# Altium PCB Passenger.PcbDoc
Units mm, origin at the board's own origin, x right, y up, seen from the top; angles counter-clockwise.
Board outline 68 x 57.1 mm, 2 copper layers (Top Layer, Bottom Layer); 49 components, 72 nets, 205 pads, 71 vias.
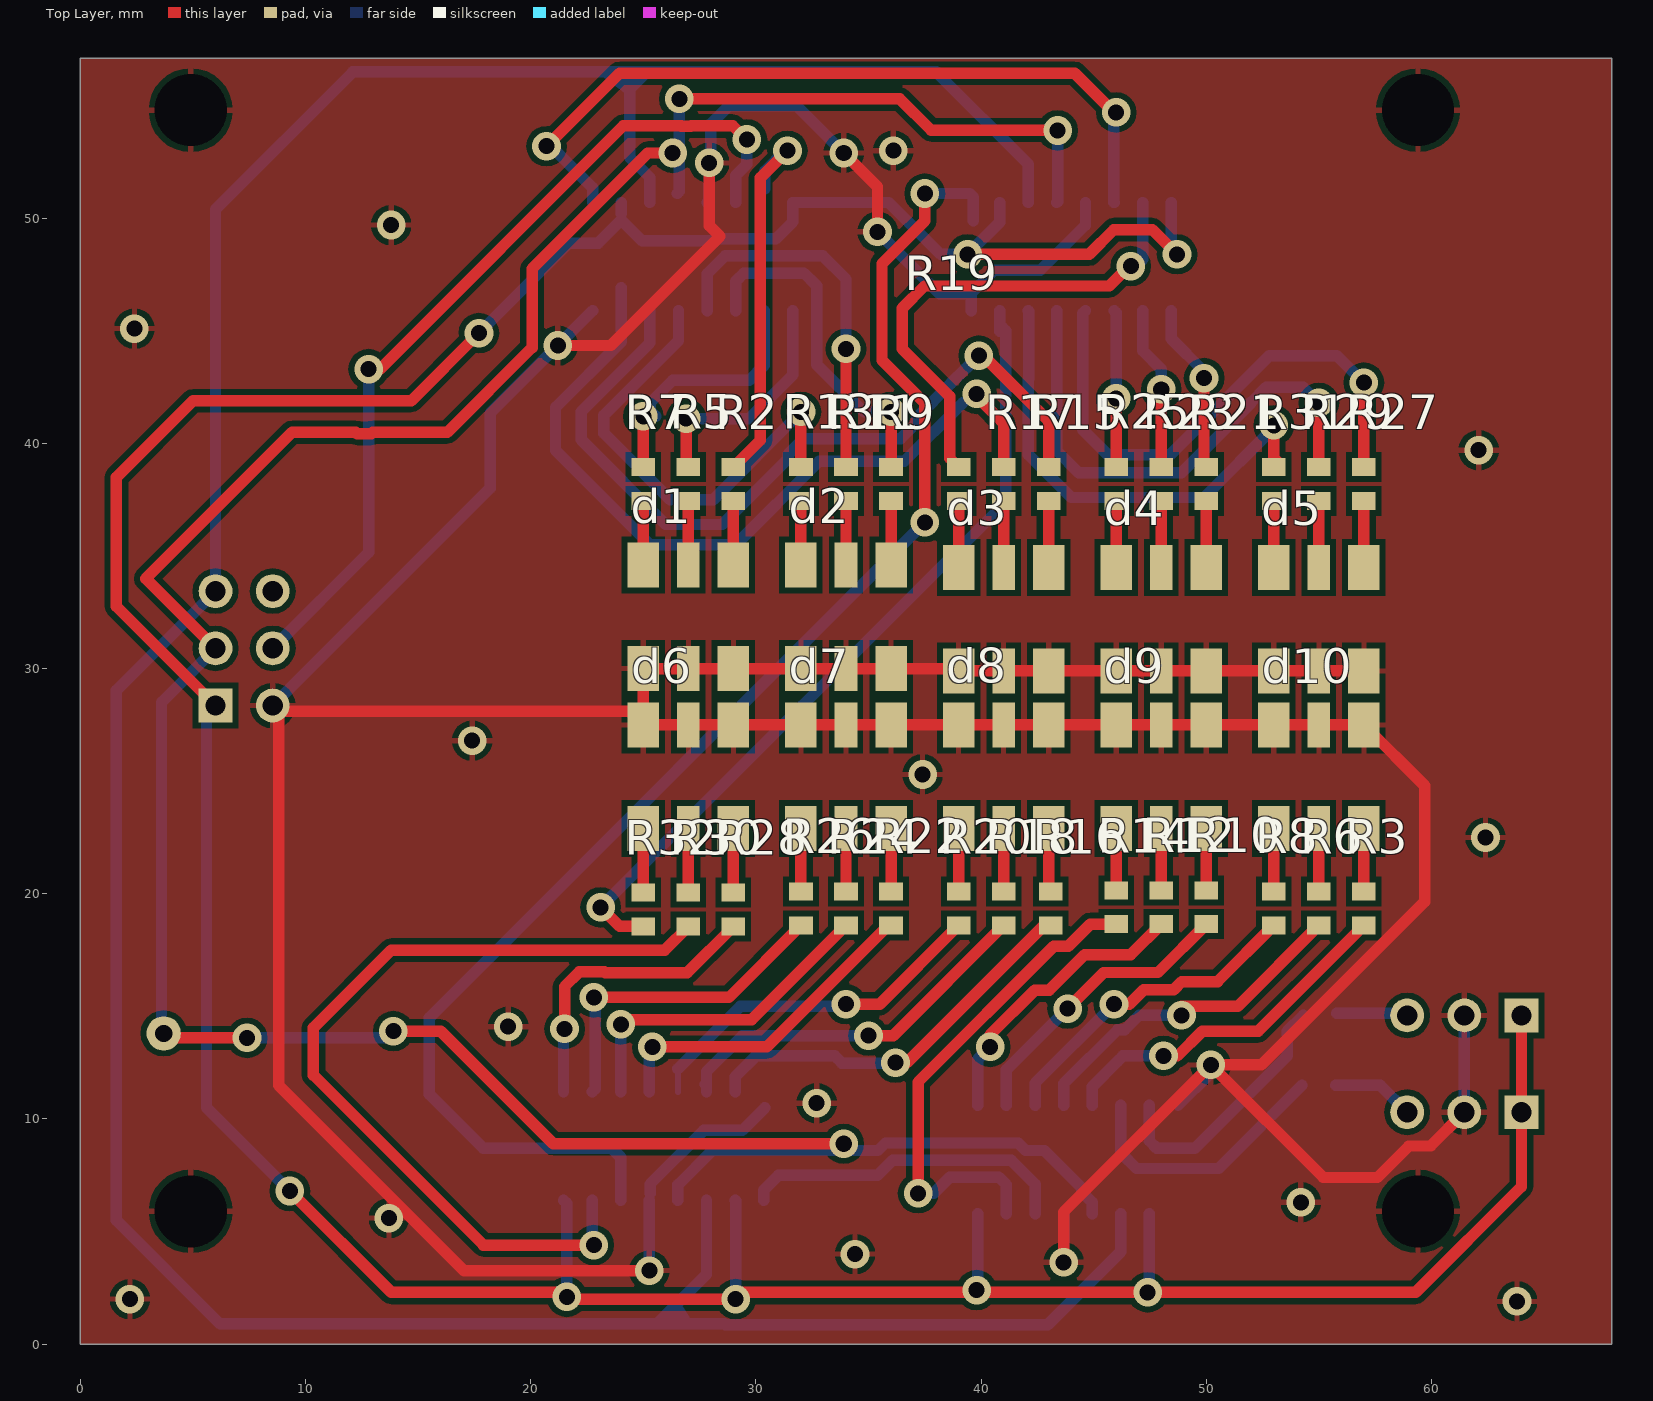
[diagram p0: Top Layer view]
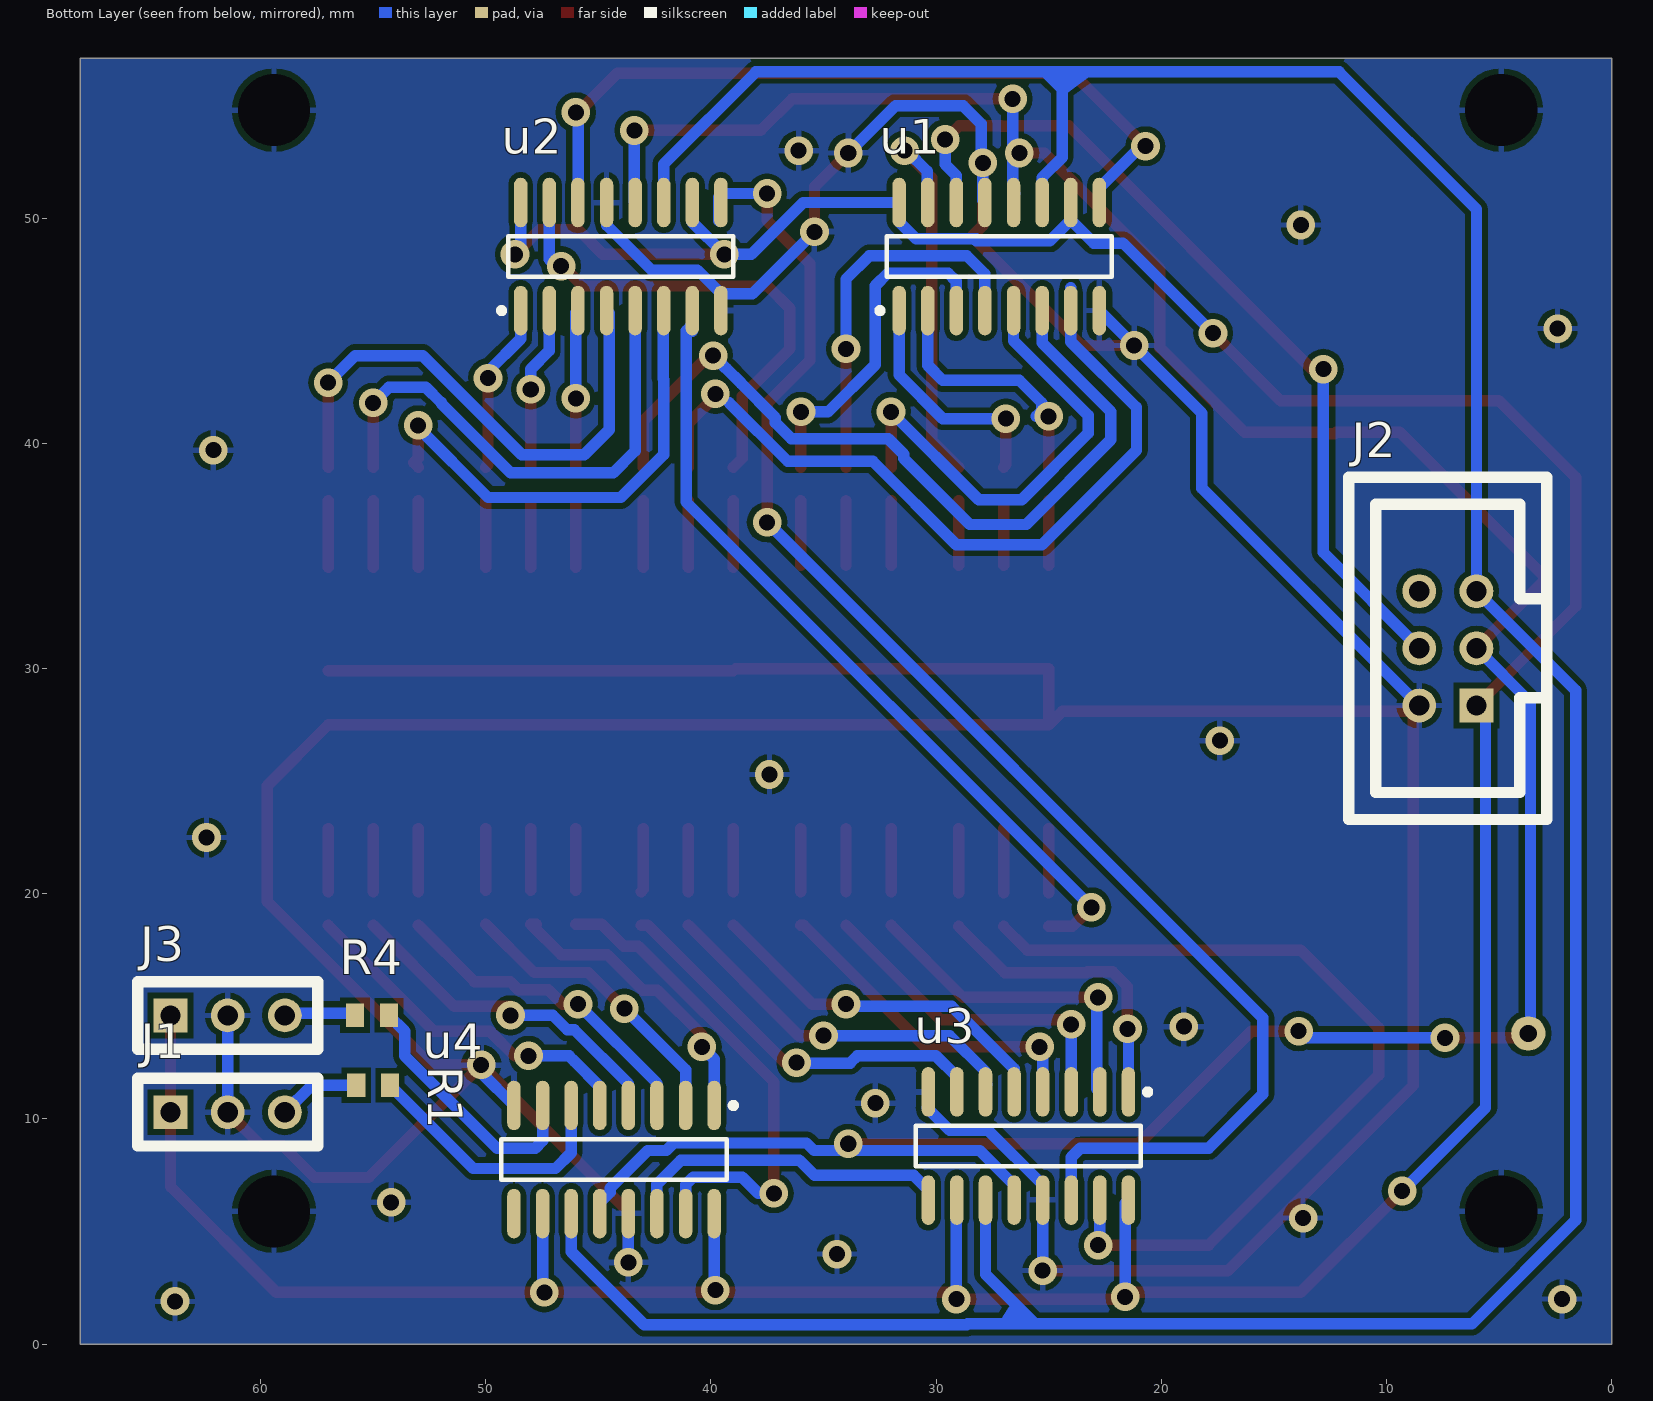
[diagram p1: Bottom Layer view, seen from below]

## Layer stack, top to bottom
Top Solder: solder mask 0.0102, Solder Resist, Dk 3.5
Top Layer: signal copper 0.0356
Dielectric1: dielectric 0.32, FR-4, Dk 4.8
Bottom Layer: signal copper 0.0356
Bottom Solder: solder mask 0.0102, Solder Resist, Dk 3.5

## Board outline
0,57.1 68,57.1 68,0 0,0

## Design rules (kind name [scope] priority, off if disabled: settings)
Clearance [All] p1: gap=0.254
FabricationTestPointUsage TestPointUsage [All] p1: valid=0 allowmultiple=FALSE
FabricationTestpoint Testpoint [All] p1: side=3 testpointundercomponent=TRUE minsize=1.016 maxsize=2.54 preferedsize=1.524 minholesize=0 maxholesize=1.016 preferedholesize=0.813 testpointgrid=0.025 allowsidetop=TRUE allowsidebottom=TRUE usegrid=TRUE gridtolerance=0
HoleSize [All] p1: absolutevalues=TRUE maxlimit=5 minlimit=0.025 maxpercent=80.000 minpercent=20.000
PolygonConnect [All] p1: connectstyle=Relief reliefconductorwidth=0.254 reliefentries=4 polygonreliefangle="90 Angle" airgapwidth=0.254
RoutingVias [All] p1: holewidth=0.711 width=1.27 viastyle="Through Hole" minholewidth=0.711 minwidth=1.27 maxholewidth=0.711 maxwidth=1.27
SilkToSolderMaskClearance SilkscreenOverComponentPads [IsPad] p1: minsilkscreentomaskgap=0.254 clearancetoexposedcopper=TRUE
SolderMaskExpansion [All] p1: expansion=0.102
Width [All] p1: maxlimit=0.6 minlimit=0.254 preferedwidth=0.254 minimp=50.000000 maximp=50.000000 favimp=50.000000
26 further rules are at their usual default settings.

## Components (designator, comment, footprint, x,y, rotation, side; value= is the part's Value field where it differs from the comment)
d1 "plcc6" plcc6 29.3,31.5 r270 top
d2 "plcc6" plcc6 36.3,31.5 r270 top
d3 "plcc6" plcc6 43.3,31.4 r270 top
d4 "plcc6" plcc6 50.3,31.4 r270 top
d5 "plcc6" plcc6 57.3,31.4 r270 top
d6 "plcc6" plcc6 24.7,26 r90 top
d7 "plcc6" plcc6 31.7,26 r90 top
d8 "plcc6" plcc6 38.7,26 r90 top
d9 "plcc6" plcc6 45.7,26 r90 top
d10 "plcc6" plcc6 52.7,26 r90 top
J1 "CNCTR" CNCTR_1X3 61.46,10.3 r90 bottom
J2 "IDC6" IDC6 7.27,30.9 r0 bottom
J3 "CNCTR" CNCTR_1X3 61.46,14.6 r90 bottom
R1 "RES" RESC1608X06M 55,11.5 r0 bottom
R2 "RES" RESC1608X06M 29,38.2 r270 top
R3 "RES" RESC1608X06M 57,19.35 r270 top
R4 "RES" RESC1608X06M 55.05,14.6 r0 bottom
R5 "RES" RESC1608X06M 27,38.2 r270 top
R6 "RES" RESC1608X06M 55,19.35 r270 top
R7 "RES" RESC1608X06M 25,38.2 r270 top
R8 "RES" RESC1608X06M 53,19.35 r270 top
R9 "RES" RESC1608X06M 36,38.2 r270 top
R10 "RES" RESC1608X06M 50,19.4 r270 top
R11 "RES" RESC1608X06M 34,38.2 r270 top
R12 "RES" RESC1608X06M 48,19.4 r270 top
R13 "RES" RESC1608X06M 32,38.2 r270 top
R14 "RES" RESC1608X06M 46,19.4 r270 top
R15 "RES" RESC1608X06M 43,38.2 r270 top
R16 "RES" RESC1608X06M 43.1,19.35 r270 top
R17 "RES" RESC1608X06M 41,38.2 r270 top
R18 "RES" RESC1608X06M 41,19.35 r270 top
R19 "RES" RESC1608X06M 39,38.2 r270 top
R20 "RES" RESC1608X06M 39,19.35 r270 top
R21 "RES" RESC1608X06M 50,38.2 r270 top
R22 "RES" RESC1608X06M 36,19.35 r270 top
R23 "RES" RESC1608X06M 48,38.2 r270 top
R24 "RES" RESC1608X06M 34,19.35 r270 top
R25 "RES" RESC1608X06M 46,38.2 r270 top
R26 "RES" RESC1608X06M 32,19.35 r270 top
R27 "RES" RESC1608X06M 57,38.2 r270 top
R28 "RES" RESC1608X06M 29,19.3 r270 top
R29 "RES" RESC1608X06M 55,38.2 r270 top
R30 "RES" RESC1608X06M 27,19.3 r270 top
R31 "RES" RESC1608X06M 53,38.2 r270 top
R32 "RES" RESC1608X06M 25,19.3 r270 top
u1 "SN74HC595D" D016_N 27.195,48.3 r90 bottom
u2 "SN74HC595D" D016_N 44,48.3 r90 bottom
u3 "SN74HC595D" D016_N 25.9,8.8 r270 bottom
u4 "SN74HC595D" D016_N 44.3,8.2 r270 bottom

## Footprints (in the part's own frame and the unit in brackets; to place one, negate y for a bottom-side part, rotate by r counter-clockwise, add the part's x,y. Pads: shape width x height; smd on the part's side, far side on the other; paste and mask are expansions set on the pad)
CNCTR_1X3 [mm] "3-pin connector"
  rect 1.5x1.5 hole 0.9: 1(0,2.54)
  round 1.5 hole 0.9: 2(0,0) 3(0,-2.54)
  silkscreen extent -1.5,-4 1.5,4
D016_N [mm] "SOIC, 16-Leads, Body 9.9x3.9mm, Pitch 1.27mm, IPC Medium Density"
  oval 2.2x0.6 smd: 1(-2.4,4.445) 2(-2.4,3.175) 3(-2.4,1.905) 4(-2.4,0.635) 5(-2.4,-0.635) 6(-2.4,-1.905) 7(-2.4,-3.175) 8(-2.4,-4.445) 9(2.4,-4.445) 10(2.4,-3.175) 11(2.4,-1.905) 12(2.4,-0.635) 13(2.4,0.635) 14(2.4,1.905) 15(2.4,3.175) 16(2.4,4.445)
  silkscreen extent -2.52,-5 0.9,5.42, body extent -1.95,-4.95 1.95,4.95, height 1.75
IDC6 [mm]
  rect 1.5x1.5 hole 0.9: 1(-1.27,2.54)
  round 1.5 hole 0.9: 2(1.27,2.54) 3(-1.27,0) 4(1.27,0) 5(-1.27,-2.54) 6(1.27,-2.54)
  silkscreen extent -4.4,-7.6 4.4,7.6, body extent -4.4,-7.6 4.4,7.6, height 9.1
plcc6 [mm]
  rect 2x1.4 smd: 1(1.5,-4.3) 3(1.5,-0.3) 4(-3.1,-0.3) 6(-3.1,-4.3)
  rect 2x1 smd: 2(1.5,-2.3) 5(-3.1,-2.3)
  body extent -2,-5.1 0.4,0.5, height 1.5
RESC1608X06M [mm] "Chip Resistor, 2-Leads, Body 1,60x0,82mm, IPC Low Density"
  rect 0.8x1.05 smd: 1(-0.75,0) 2(0.75,0)
  body extent -0.85,-0.48 0.85,0.48, height 0.6

## Part data
J1 J3: library part Connector, "3pin connector"
J2: "6pin IDC connector"
R1 R2 R3 R4 R5 R6 R7 R8 R9 R10 R11 R12 R13 R14 R15 R16 R17 R18 R19 R20 R21 R22 R23 R24 R25 R26 R27 R28 R29 R30 R31 R32: "Resistor"
u1 u2 u3 u4: "8-Bit Shift Register with 3-State Output Registers"

## Free pads (board coordinates)
  round 1.524 hole 0.762: 2(3.7,13.8)
  round 0 hole 3.2: 3(4.9,54.8) 4(59.4,54.8) 5(59.4,5.9) 6(4.9,5.9)

## Via types
v1: diameter 1.27, hole 0.711, Top Layer to Bottom Layer, 71 vias

## Nets (pads, with @x,y where several pads share a name; then routed paths per layer and width w, separated by ;. In a path a pad name is that pad's centre, name@x,y a point inside that pad or via, vN(x,y) a via of type N, cw(c..) or ccw(c..) an arc to the next point about the centre after c; other vN are vias at no path point)
GND: d1.1 d1.2 d1.3 d2.1 d2.2 d2.3 d3.1 d3.2 d3.3 d4.1 d4.2 d4.3 d5.1 d5.2 d5.3 d6.1 d6.2 d6.3 d7.1 d7.2 d7.3 d8.1 d8.2 d8.3 d9.1 d9.2 d9.3 d10.1 d10.2 d10.3 J1.2 J2.2 J3.2 pad.3 pad.4 pad.5 pad.6 u1.8 u1.13 u2.8 u2.13 u3.8 u3.13 u4.8 u4.13 | length 251.1
  Top Layer w0.508: J2.2@8.4,28.1 J2.2@8.54,28.1 ; J2.2 J2.2@8.54,28.1 ; v1(21.2,44.35) 23.55,44.35 28.4,49.2 27.924,49.676 v1(27.924,52.46) ; v1(25.265,3.265) 23.281,3.265 23.273,3.257 22.327,3.257 22.319,3.265 17.035,3.265 8.8,11.5 8.8,27.84 J2.2@8.54,28.1 ; v1(33.9,52.9) 35.4,51.4 v1(35.4,49.4) ; v1(43.665,3.635) 43.665,5.865 v1(50.2,12.4) ; d5.3 d5.2 d5.1 d4.3 d4.2 d4.1 d3.3 d3.2 d3.1 38.9,30 d2.3 d2.2 d2.1 d1.3 d1.2 d1.1 d6.3 ; J1.2 59.96,8.8 59,8.8 57.6,7.4 55.2,7.4 v1(50.2,12.4) ; J2.2@8.54,28.1 24.4,28.1 d6.3 ; d6.3 d6.2 d6.1 d7.3 d7.2 d7.1 d8.3 d8.2 d8.1 d9.3 d9.2 d9.1 d10.3 d10.2 d10.1 59.7,24.8 59.7,19.657 52.443,12.4 v1(50.2,12.4)
  Bottom Layer w0.508: J2.2 18.2,38.02 18.2,41.35 v1(21.2,44.35) u1.8 ; v1@25.2,3.2 v1(25.265,3.265) u3.13 ; u3.13@25.3,6.7 25.3,7.108 27.692,9.5 29.4,9.5 u3.8@30.4,10.5 ; u1.13 27.924,50.794 v1(27.924,52.46) 27.924,52.636 27.83,52.73 28,52.9 28,54.2 28.8,55 31.8,55 v1(33.9,52.9) ; v1(35.4,49.4) 38.155,46.645 u2.8@39.555,46.645 ; u2.8 u2.8@39.555,46.645 ; u4.13 v1(43.665,3.635) v1@43.7,3.6 ; u2.13 44.635,49.7 42.635,47.7 40.6,47.7 39.555,46.655 u2.8@39.555,46.645 ; u4.8 50.2,12.055 v1(50.2,12.4) ; J1.2 J3.2
  other v1: 63.8,1.9 2.2,2 34.4,4 13.7,5.6 54.2,6.3 32.7,10.7 19,14.1 62.4,22.5 37.4,25.3 17.4,26.8 62.1,39.7 2.4,45.1 13.8,49.7 36.1,53
Netd1_4: d1.4 R2.2 | length 2.9
  Top Layer w0.508: d1.4 R2.2
Netd1_5: d1.5 R5.2 | length 2.9
  Top Layer w0.508: d1.5 R5.2
Netd1_6: d1.6 R7.2 | length 2.9
  Top Layer w0.508: d1.6 R7.2
Netd2_4: d2.4 R9.2 | length 2.9
  Top Layer w0.508: d2.4 R9.2
Netd2_5: d2.5 R11.2 | length 2.9
  Top Layer w0.508: d2.5 R11.2
Netd2_6: d2.6 R13.2 | length 2.9
  Top Layer w0.508: d2.6 R13.2
Netd3_4: d3.4 R15.2 | length 3
  Top Layer w0.508: d3.4 R15.2
Netd3_5: d3.5 R17.2 | length 3
  Top Layer w0.508: d3.5 R17.2
Netd3_6: d3.6 R19.2 | length 3
  Top Layer w0.508: d3.6 R19.2
Netd4_4: d4.4 R21.2 | length 3
  Top Layer w0.508: d4.4 R21.2
Netd4_5: d4.5 R23.2 | length 3
  Top Layer w0.508: d4.5 R23.2
Netd4_6: d4.6 R25.2 | length 3
  Top Layer w0.508: d4.6 R25.2
Netd5_4: d5.4 R27.2 | length 3
  Top Layer w0.508: d5.4 R27.2
Netd5_5: d5.5 R29.2 | length 3
  Top Layer w0.508: d5.5 R29.2
Netd5_6: d5.6 R31.2 | length 3
  Top Layer w0.508: d5.6 R31.2
Netd6_4: d6.4 R32.1 | length 2.9
  Top Layer w0.508: R32.1 d6.4
Netd6_5: d6.5 R30.1 | length 2.8
  Top Layer w0.508: R30.1 d6.5
Netd6_6: d6.6 R28.1 | length 2.9
  Top Layer w0.508: R28.1 d6.6
Netd7_4: d7.4 R26.1 | length 2.8
  Top Layer w0.508: R26.1 d7.4
Netd7_5: d7.5 R24.1 | length 2.8
  Top Layer w0.508: R24.1 d7.5
Netd7_6: d7.6 R22.1 | length 2.8
  Top Layer w0.508: R22.1 d7.6
Netd8_4: d8.4 R20.1 | length 2.8
  Top Layer w0.508: R20.1 d8.4
Netd8_5: d8.5 R18.1 | length 2.8
  Top Layer w0.508: R18.1 d8.5
Netd8_6: d8.6 R16.1 | length 2.8
  Top Layer w0.508: d8.6 43,20.2 R16.1
Netd9_4: d9.4 R14.1 | length 2.7
  Top Layer w0.508: R14.1 d9.4
Netd9_5: d9.5 R12.1 | length 2.7
  Top Layer w0.508: R12.1 d9.5
Netd9_6: d9.6 R10.1 | length 2.8
  Top Layer w0.508: R10.1 d9.6
Netd10_4: d10.4 R8.1 | length 2.8
  Top Layer w0.508: R8.1 d10.4
Netd10_5: d10.5 R6.1 | length 2.8
  Top Layer w0.508: R6.1 d10.5
Netd10_6: d10.6 R3.1 | length 2.8
  Top Layer w0.508: R3.1 d10.6
NetJ1_1: J1.1 J2.1 J3.1 u1.10 u1.16 u2.10 u2.16 u3.10 u3.16 u4.10 u4.16 | length 178.3
  Top Layer w0.508: J2.1 1.6,32.76 1.6,38.5 5,41.9 14.7,41.9 v1(17.7,44.9) ; v1(9.3,6.8) 13.8,2.3 v1@21.6,2.3 ; v1(21.6,2.1) 21.7,2 v1(29.1,2) ; v1@29.1,2.122 29.278,2.3 v1(47.4,2.3) 59.3,2.3 64,7 J1.1 J3.1 ; v1(39.4,48.4) 44.8,48.4 45.9,49.5 47.6,49.5 v1(48.7,48.4)
  Bottom Layer w0.508: J2.1 5.6,27.96 5.6,10.5 v1(9.3,6.8) ; v1(17.7,44.9) 21.7,48.9 23,48.9 24.02,49.92 24.94,49 28.222,49 ; u3.16 21.6,6.255 v1(21.6,2.1) ; u1.10@24.02,50.207 u1.10 ; 28.222,49.092 30.892,49.092 31.64,49.84 u1.16 35.9,50.7 38.2,48.4 v1(39.4,48.4) 40.825,49.825 u2.10 ; u3.10 29.1,6.375 v1(29.1,2) ; v1(39.8,2.4) 39.855,2.455 u4.16 ; v1(47.4,2.3) 47.45,2.3 47.475,2.275 u4.10 ; u2.16 48.445,48.655 v1(48.7,48.4)
NetJ1_3: J1.3 R1.2 | length 3.7
  Bottom Layer w0.508: R1.2 57.72,11.5 J1.3
NetJ2_3: J2.3 pad.2 u1.12 u2.12 u3.12 u4.12 | length 134.3
  Top Layer w0.508: pad.2 4.3,13.6 v1(7.4,13.6) ; J2.3 2.9,34 9.4,40.5 12.222,40.5 12.284,40.438 12.916,40.438 12.978,40.5 16.3,40.5 20.057,44.257 20.057,47.757 25.2,52.9 26,52.9 v1@26.2,52.7 ; v1(13.9,13.9) 16,13.9 21,8.9 v1(33.9,8.9) ; v1(26.6,55.3) 36.392,55.3 37.776,53.916 v1@43.4,53.916
  Bottom Layer w0.508: pad.2@4,14 3.6,14.4 3.6,28.5 J2.3 ; v1(7.4,13.6) 13.5,13.6 v1@13.7,13.8 ; u1.12@26.5,51.1 26.6,51.2 v1(26.6,55.3) ; u3.12 26.535,7.073 28.062,8.6 35.422,8.6 35.754,8.932 41.646,8.932 41.978,8.6 42.808,8.6 44.473,6.935 44.473,6.755 44.935,6.293 u4.12 ; u2.12 43.4,50.735 v1(43.4,53.9)
  other v1: 26.3,52.9
NetJ2_4: J2.4 u1.14 | length 38.5
  Top Layer w0.508: v1@13,43.3 13.3,43.3 24.1,54.1 26.682,54.1 26.69,54.092 27.11,54.092 27.118,54.1 28.976,54.1 v1@29.6,53.476
  Bottom Layer w0.508: J2.4 12.8,35.16 v1(12.8,43.3) ; u1.14 29.1,51.9 29.6,52.4 v1(29.6,53.5)
NetJ2_5: J2.5 u1.11 u2.11 u3.11 u4.11 | length 150.9
  Bottom Layer w0.508: u1.11 25.29,51.81 24.4,52.7 24.4,56.5 ; u3.11 27.805,3.105 25.6,0.9 ; u2.11 42.095,52.405 38,56.5 24.4,56.5 ; u4.11 46.205,4.105 42.957,0.857 28.627,0.857 28.584,0.9 25.6,0.9 ; 24.4,56.5 12.1,56.5 6,50.4 J2.5 1.6,29.04 1.6,5.5 6.2,0.9 25.6,0.9
NetJ3_3: J3.3 R4.2 | length 3.1
  Bottom Layer w0.508: R4.2@55.8,14.7 J3.3@58.92,14.7
NetR1_1: R1.1 u4.6 | length 12
  Bottom Layer w0.508: u4.6 46.205,8.495 46.9,7.8 50.55,7.8 R1.1
NetR2_1: R2.1 u1.15 | length 17.2
  Top Layer w0.508: R2.1 30.2,40.15 30.2,51.8 v1(31.4,53)
  Bottom Layer w0.508: u1.15@30.4,51.3 30.4,52.1 31.3,53 v1(31.4,53)
NetR3_2: R3.2 u4.5 | length 15.9
  Top Layer w0.508: v1(48.1,12.8) 48.716,12.8 49.816,13.9 52.3,13.9 R3.2
  Bottom Layer w0.508: u4.5 44.935,11.435 46.05,12.55 46.3,12.8 v1(48.1,12.8)
NetR4_1: R4.1 u4.7 | length 11.6
  Bottom Layer w0.508: u4.7 47.475,9.025 47.8,8.7 49.5,8.7 53.6,12.8 53.6,13.9 R4.1
NetR5_1: R5.1 u1.1 | length 10.6
  Top Layer w0.508: v1(26.9,41.1) 26.9,39.05 R5.1
  Bottom Layer w0.508: v1(26.9,41.1) 29.7,41.1 31.64,43.04 u1.1
NetR6_2: R6.2 u4.4 | length 16
  Top Layer w0.508: v1(48.9,14.6) 48.5,14.6 48.9,15 51.4,15 R6.2
  Bottom Layer w0.508: u4.4 43.665,11.565 46.057,13.957 46.373,13.957 47.016,14.6 v1(48.9,14.6)
NetR7_1: R7.1 u1.2 | length 11.7
  Top Layer w0.508: R7.1 v1(25,41.2)
  Bottom Layer w0.508: v1(25,41.2) 25.563,41.2 25.3,41.463 25.3,41.8 26.3,42.8 29.7,42.8 30.37,43.47 u1.2
NetR8_2: R8.2 u4.3 | length 14.5
  Top Layer w0.508: v1(45.9,15.1) 46.584,15.1 47.227,15.743 48.557,15.743 48.914,16.1 50.5,16.1 R8.2
  Bottom Layer w0.508: u4.3 42.395,11.595 v1(45.9,15.1)
NetR9_1: R9.1 u1.3 | length 15.4
  Top Layer w0.508: R9.1 v1(36,41.4)
  Bottom Layer w0.508: u1.3 29.1,47.2 29.468,47.568 32.132,47.568 32.7,47 32.7,43.5 34.8,41.4 v1(36,41.4)
NetR10_2: R10.2 u4.2 | length 13.1
  Top Layer w0.508: v1(43.842,14.9) 45.447,16.505 47.855,16.505 R10.2
  Bottom Layer w0.508: u4.2 41.125,12.183 v1(43.842,14.9)
NetR11_1: R11.1 u1.4 | length 16.9
  Top Layer w0.508: R11.1 v1(34,44.2)
  Bottom Layer w0.508: u1.4 27.83,47.53 28.63,48.33 32.97,48.33 34,47.3 v1(34,44.2)
NetR12_2: R12.2 u4.1 | length 13.2
  Top Layer w0.508: v1(40.4,13.2) 40.4,13.737 42.382,15.718 43.018,15.718 44.6,17.3 46.65,17.3 R12.2 R12.2@47.75,18.65
  Bottom Layer w0.508: u4.1 39.855,12.655 v1(40.4,13.2)
NetR13_1: R13.1 u1.5 | length 20.9
  Top Layer w0.508: R13.1 v1(32,41.4)
  Bottom Layer w0.508: u1.5 26.56,44.56 23.25,41.25 23.25,40.45 26.2,37.5 28.1,37.5 v1(32,41.4)
NetR14_2: R14.2 u4.15 | length 22.3
  Top Layer w0.508: v1(37.2,6.7) 37.2,11.637 43.231,17.668 43.868,17.668 44.85,18.65 R14.2
  Bottom Layer w0.508: v1(37.2,6.7) 37.9,6.7 38.608,7.408 40.792,7.408 41.125,7.075 u4.15
NetR15_1: R15.1 u1.6 | length 35.9
  Top Layer w0.508: v1(39.9,43.9) 40.1,43.9 43,41 R15.1
  Bottom Layer w0.508: u1.6 25.29,44.468 22.238,41.416 22.238,40.162 26,36.4 28.5,36.4 31.436,39.336 31.436,39.516 32.129,40.208 36.425,40.208 37.143,40.927 37.143,41.143 38.657,42.657 38.657,42.673 39.327,43.343 39.343,43.343 v1(39.9,43.9)
NetR16_2: R16.2 u3.7 | length 17.9
  Top Layer w0.508: v1(36.2,12.5) 36.7,12.5 42.8,18.6 R16.2
  Bottom Layer w0.508: u3.7 29.075,11.873 30.01,12.808 33.492,12.808 33.819,12.481 v1@36.4,12.481
NetR17_1: R17.1 u1.7 | length 34.6
  Top Layer w0.254: v1@39.8,42.1 v1(39.8,42.2)
  Top Layer w0.508: v1@39.8,42.1 41,40.9 R17.1
  Bottom Layer w0.508: u1.7@24.02,46.92 u1.7 24.02,44.52 21.1,41.6 21.1,39.7 25.3,35.5 29.1,35.5 32.8,39.2 36.581,39.2 39.181,41.8
NetR18_2: R18.2 u3.6 | length 16.8
  Top Layer w0.508: v1(35,13.7) 36.1,13.7 R18.2
  Bottom Layer w0.508: u3.6@27.75,11.55 27.805,11.605 u3.6 ; u3.6@27.805,11.693 27.805,12.105 29.4,13.7 v1(35,13.7)
NetR19_1: R19.1 u2.15 | length 22.1
  Top Layer w0.508: R19.1 38.6,39.35 38.6,42.1 36.5,44.2 36.5,46 37.492,46.992 45.692,46.992 46.573,47.873 v1(46.647,47.873)
  Bottom Layer w0.508: v1@46.76,47.76 47.175,48.175 u2.15
NetR20_2: R20.2 u3.5 | length 16.1
  Top Layer w0.508: v1(34,15.1) 35.5,15.1 R20.2
  Bottom Layer w0.254: u3.5 u3.5@26.535,12.235
  Bottom Layer w0.508: u3.5@26.535,12.235 29.3,15 33.7,15 v1@33.9,14.8
NetR21_1: R21.1 u2.1 | length 7.6
  Top Layer w0.508: v1(49.9,42.9) 49.9,39.05 R21.1
  Bottom Layer w0.508: u2.1 48.445,44.655 49.9,43.2 v1(49.9,42.9)
NetR22_2: R22.2 u3.4 | length 14.9
  Top Layer w0.508: v1(25.4,13.2) 30.484,13.2 35.884,18.6 R22.2
  Bottom Layer w0.508: u3.4 25.265,13.065 v1(25.4,13.2)
NetR23_1: R23.1 u2.2 | length 7.3
  Top Layer w0.508: R23.1 v1(48,42.4)
  Bottom Layer w0.508: u2.2 47.175,44.125 48,43.3 v1(48,42.4)
NetR24_2: R24.2 u3.3 | length 14.9
  Top Layer w0.508: v1(24,14.2) 24,14.4 24.016,14.416 29.816,14.416 R24.2
  Bottom Layer w0.508: u3.3 24,11.205 v1(24,14.2)
NetR25_1: R25.1 u2.3 | length 7
  Top Layer w0.508: R25.1 v1(46,42)
  Bottom Layer w0.508: u2.3 46,45.805 v1(46,42)
NetR26_2: R26.2 u3.2 | length 15.1
  Top Layer w0.508: v1(22.8,15.4) 28.8,15.4 R26.2
  Bottom Layer w0.508: u3.2 22.857,11.332 22.857,15.557 22.8,15.5 v1(22.8,15.4)
NetR27_1: R27.1 u2.4 | length 24.4
  Top Layer w0.508: R27.1 v1(57,42.7)
  Bottom Layer w0.508: u2.4 44.51,45.775 44.51,40.61 45.621,39.5 48.4,39.5 52.8,43.9 55.8,43.9 v1(57,42.7)
NetR28_2: R28.2 u3.1 | length 13.3
  Top Layer w0.508: v1(21.5,14) 21.5,15.882 22.161,16.543 23.273,16.543 23.316,16.5 26.95,16.5 R28.2
  Bottom Layer w0.508: u3.1 v1@21.455,13.945
NetR29_1: R29.1 u2.5 | length 23
  Top Layer w0.508: R29.1 v1(55,41.8)
  Bottom Layer w0.508: u2.5 43.365,39.665 44.33,38.7 48.9,38.7 51.984,41.784 51.984,41.821 52.663,42.5 54.3,42.5 v1(55,41.8)
NetR30_2: R30.2 u3.15 | length 38.1
  Top Layer w0.508: v1(22.8,4.4) 17.9,4.4 10.35,11.95 10.35,14.05 13.8,17.5 25.95,17.5 R30.2
  Bottom Layer w0.508: v1@22.725,4.525 u3.15
NetR31_1: R31.1 u2.6 | length 21.5
  Top Layer w0.508: R31.1 53.2,39.15 53,39.35 v1(53,40.8)
  Bottom Layer w0.508: u2.6 42.124,45.871 42.124,42.869 42.095,42.84 42.095,39.505 44,37.6 49.9,37.6 53,40.7 v1(53,40.8)
NetR32_2: R32.2 u2.7 | length 36.6
  Top Layer w0.508: v1(23.1,19.4) 23.95,18.55 R32.2
  Bottom Layer w0.508: v1(23.1,19.4) 41.1,37.4 41.1,45 u2.7@40.825,45.275 ; u2.7@40.825,44.975 u2.7@40.825,45.275 ; u2.7 u2.7@40.825,45.275
Netu1_9: u1.9 u2.14 | length 34.3
  Top Layer w0.508: v1(20.7,53.2) 23.943,56.443 44.157,56.443 45.6,55 v1@45.9,55
  Bottom Layer w0.508: v1(20.7,53.2) 20.9,53.2 22.75,51.35 u1.9 ; v1@45.9,54.4 45.9,50.705 u2.14
  other v1: 46,54.7
Netu2_9: u2.9 u3.14 | length 65.5
  Top Layer w0.508: v1(37.5,36.5) 37.5,41.8 35.6,43.7 35.6,47.984 37.5,49.884 v1(37.5,51.1)
  Bottom Layer w0.508: u3.14 23.995,8.305 23.6,8.7 17.9,8.7 15.5,11.1 15.5,14.5 v1(37.5,36.5) ; v1(37.5,51.1) 39.5,51.1 39.655,50.945 u2.9@39.655,49.9
Netu3_9: u3.9 u4.14 | length 14.8
  Bottom Layer w0.508: u3.9 30.345,6.845 31,7.5 35.4,7.5 36.07,8.17 41.33,8.17 42.395,7.105 u4.14
pads on no net: J2.6 u4.9

## Polygon pours and split planes (outlines as drawn)
GND on Top Layer "Top Layer" (solid, pour order 0): 0,57.1 68,57.1 68,0 0,0
GND on Bottom Layer "Bot GND Layer" (solid, pour order 1): 0,57.1 68,57.1 68,0 0,0

## Other copper
Bottom Layer:
  region net NetJ2_5: 22.636,56.7 24.4,55.4 24.7,55.7 25.7,56.7
  region net NetJ2_5: 26.6,1.9 25.6,0.9 27.2,0.9 27.3,0.8

## Silkscreen, mask and mechanical layers (free items; w line width, h text height)
Mechanical 16:
  drawing of 1874 lines, arcs and shapes, not listed
  text "1" at -64.354,85.911 h1.78
  text "2" at 8.29,85.911 h1.78
  text "3" at 81.442,85.911 h1.78
  text "4" at 154.34,85.911 h1.78
  text "A" at -98.695,62.899 h1.78
  text "A" at 188.325,62.899 h1.78
  text "B" at -98.695,14.842 h1.78
  text "B" at 17.925,-6.358 h1.78
  text "C" at -98.695,-33.672 h1.78
  text "C" at 188.325,-33.672 h1.78
  text "ENGINEER:" at 73.39,-70.68 h1.14
  text "TITLE:" at 111.49,-70.68 h1.14
  text "PCB DESIGNER:" at 73.39,-78.173 h1.14
  text "D" at -98.695,-81.678 h1.78
  text "D" at 188.325,-81.678 h1.78
  text "DATE:" at 73.39,-85.92 h1.14
  text "PART NO.:" at 111.49,-85.92 h1.14
  text "REV:" at 164.83,-85.92 h1.14
  text "Altium Limited" at 40.37,-88.46 h1.78
  text ".PRINT_DATE" at 74.66,-88.968 h1.78
  text "12a Rodborough Rd" at 40.37,-91 h1.78
  text "Frenchs Forest" at 40.37,-93.54 h1.78
  text "FILE NAME:" at 73.39,-93.54 h1.14
  text "DWG NO:" at 111.49,-93.54 h1.14
  text "SCALE:" at 164.83,-93.54 h1.14
  text "NSW 2086" at 40.37,-96.08 h1.78
  text ".PCB_FILE_NAME_NO_PATH" at 74.66,-96.588 h1.78
  text "1" at -64.354,-102.049 h1.78
  text "2" at 8.29,-102.049 h1.78
  text "3" at 81.442,-102.049 h1.78
  text "4" at 154.34,-102.049 h1.78